# Altium PCB BGA Modules.PcbDoc
Units mil, origin at the board's own origin, x right, y up, seen from the top; angles counter-clockwise.
Board outline 405 x 415 mil, 2 copper layers (Top Layer, Bottom Layer); 9 components, 9 nets, 72 pads, 8 vias.
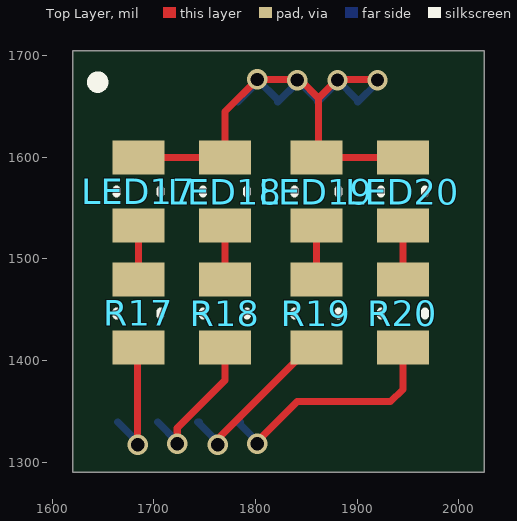
[diagram p0: Top Layer view]
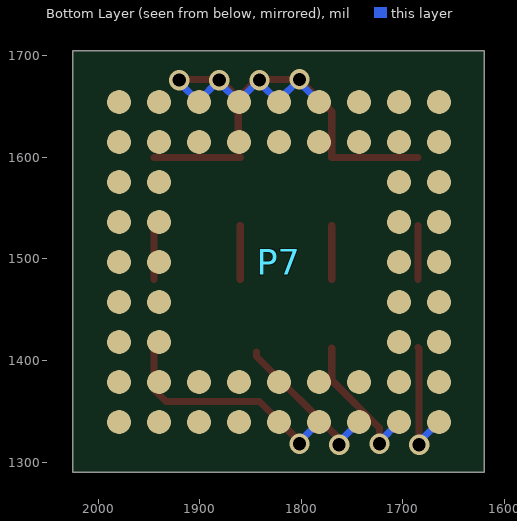
[diagram p1: Bottom Layer view, seen from below]

## Layer stack, top to bottom
Top Layer: signal copper 1.4
Dielectric: dielectric 12.6, FR-4, Dk 4.8
Bottom Layer: signal copper 1.4

## Board outline
1620,1290 2025,1290 2025,1705 1620,1705

## Design rules (kind name [scope] priority, off if disabled: settings)
Clearance [All] p1: gap=7
ComponentClearance [All] p1 off: gap=10 collisioncheckmode=3 verticalgap=10 showdistances=FALSE
PolygonConnect [All] p1: connectstyle=Relief reliefconductorwidth=10 reliefentries=4 polygonreliefangle="90 Angle" airgapwidth=10
RoutingVias [All] p1: holewidth=28 width=50 viastyle="Through Hole" minholewidth=28 minwidth=50 maxholewidth=28 maxwidth=50
SolderMaskExpansion [All] p1: expansion=4
Width [All] p1: maxlimit=10 minlimit=7 preferedwidth=10
27 further rules are at their usual default settings.

## Components (designator, comment, footprint, x,y, rotation, side; value= is the part's Value field where it differs from the comment)
LED17 "LED_1206" RESC0805(2012)70_L 1685,1566.32 r90 top
LED18 "LED_1206" RESC0805(2012)70_L 1770,1566.32 r90 top
LED19 "LED_1206" RESC0805(2012)70_L 1860,1566.32 r90 top
LED20 "LED_1206" RESC0805(2012)70_L 1945,1566.32 r90 top
P7 "MODCMP-P056-M10X10" MODCMP-P056-M10X10 1625,1693.7 r0 top
R17 "0805" RESC0805(2012)70_L 1685,1446.32 r270 top
R18 "0805" RESC0805(2012)70_L 1770,1446.32 r270 top
R19 "0805" RESC0805(2012)70_L 1860,1446.32 r270 top
R20 "0805" RESC0805(2012)70_L 1945,1446.32 r270 top

## Footprints (in the part's own frame and the unit in brackets; to place one, negate y for a bottom-side part, rotate by r counter-clockwise, add the part's x,y. Pads: shape width x height; smd on the part's side, far side on the other; paste and mask are expansions set on the pad)
MODCMP-P056-M10X10 [mm] "Module Component - 1mm Pitch, 56-Pin, 10x10mm"
  round 0.6 smd far side mask+0.05: A1(1,-1) A2(2,-1) A3(3,-1) A4(4,-1) A5(5,-1) A6(6,-1) A7(7,-1) A8(8,-1) A9(9,-1) B1(1,-2) B2(2,-2) B3(3,-2) B4(4,-2) B5(5,-2) B6(6,-2) B7(7,-2) B8(8,-2) B9(9,-2) C1(1,-3) C2(2,-3) C8(8,-3) C9(9,-3) D1(1,-4) D2(2,-4) D8(8,-4) D9(9,-4) E1(1,-5) E2(2,-5) E8(8,-5) E9(9,-5) F1(1,-6) F2(2,-6) F8(8,-6) F9(9,-6) G1(1,-7) G2(2,-7) G8(8,-7) G9(9,-7) H1(1,-8) H2(2,-8) H3(3,-8) H4(4,-8) H5(5,-8) H6(6,-8) H7(7,-8) H8(8,-8) H9(9,-8) J1(1,-9) J2(2,-9) J3(3,-9) J4(4,-9) J5(5,-9) J6(6,-9) J7(7,-9) J8(8,-9) J9(9,-9)
  silkscreen extent 0.38,-0.62 0.62,-0.38
RESC0805(2012)70_L [mm] "Chip Resistor, Body 2.0x1.3mm, IPC High Density"
  rect 0.85x1.3 smd: 1(-0.85,0) 2(0.85,0)
  silkscreen extent -0.05,-0.55 0.05,0.55, body extent -1.1,-0.67 1.1,0.68, height 0.7

## Part data
LED17 LED18 LED19 LED20: library part CMP-0201-0036, "GREEN color, 1206, SMD"
P7: library part MOD-0100-0123, "Module Component - 1mm Pitch, 56-Pin, 10mmX10mm"
R17 R18 R19 R20: library part CMP-0501-0000, "Jumper 0805 (2012 Metric)"

## Via types
v1: diameter 20, hole 13, Top Layer to Bottom Layer, tented both sides, 8 vias

## Nets (pads, with @x,y where several pads share a name; then routed paths per layer and width w, separated by ;. In a path a pad name is that pad's centre, name@x,y a point inside that pad or via, vN(x,y) a via of type N, cw(c..) or ccw(c..) an arc to the next point about the centre after c; other vN are vias at no path point)
GND: LED17.2 LED18.2 LED19.2 LED20.2 P7.A4 P7.A5 P7.A6 P7.A7 | length 662.8
  Top Layer w7: LED17.2 LED18.2 1770,1644.95 v1(1801.75,1676.7) 1840.3,1676.7 v1(1841,1676) 1844.21,1676 1862,1658.21 ; v1@1880.21,1676.42 1862,1658.21 ; v1@1880.49,1676.7 1919.3,1676.7 v1(1920,1676) ; LED20.2 LED19.2 1862,1601.78 1862,1658.21
  Bottom Layer w7: P7.A4 1801.75,1673.6 v1(1801.75,1676.7) 1821.85,1656.6 P7.A5 1841,1673.48 v1(1841,1676) 1861.22,1655.78 P7.A6 1880.63,1673.74 v1(1880.63,1676) 1900.59,1656.04 P7.A7 1920,1673.74 v1(1920,1676)
LED_C1: P7.J1 R17.2 | length 127.1
  Top Layer w7: v1(1684,1317) 1684,1411.85 R17.2
  Bottom Layer w7: P7.J1@1664.73,1339.37 P7.J1 1684,1319.74 v1(1684,1317)
LED_C2: P7.J2 R18.2 | length 143.1
  Top Layer w7: v1(1723,1318) 1723,1333.64 1770,1380.64 R18.2@1770,1412.32
  Bottom Layer w7: P7.J2 1723,1320.11 v1(1723,1318)
LED_C3: P7.J3 R19.2 | length 152.3
  Top Layer w7: v1@1762,1322 1844,1404 R19.2@1844,1408.32
  Bottom Layer w7: P7.J3@1744.63,1339.37 P7.J3 1762.74,1319.74 v1(1762.74,1317)
LED_C4: P7.J4 R20.2 | length 234.7
  Top Layer w7: v1@1801,1322 1803.36,1322 1841,1359.64 1933,1359.64 1945,1371.64 R20.2@1945,1413.32
  Bottom Layer w7: P7.J4@1785.27,1339.37 P7.J4 1799.85,1322 v1@1801,1322
  other v1: 1801.74,1318
NetLED17_1: LED17.1 R17.1 | length 53.1
  Top Layer w7: R17.1 LED17.1
NetLED18_1: LED18.1 R18.1 | length 53.1
  Top Layer w7: R18.1 LED18.1
NetLED19_1: LED19.1 R19.1 | length 53.1
  Top Layer w7: R19.1 LED19.1
NetLED20_1: LED20.1 R20.1 | length 53.1
  Top Layer w7: R20.1 LED20.1
pads on no net: P7.A1 P7.A2 P7.A3 P7.A8 P7.A9 P7.B1 P7.B2 P7.B3 P7.B4 P7.B5 P7.B6 P7.B7 P7.B8 P7.B9 P7.C1 P7.C2 P7.C8 P7.C9 P7.D1 P7.D2 P7.D8 P7.D9 P7.E1 P7.E2 P7.E8 P7.E9 P7.F1 P7.F2 P7.F8 P7.F9 P7.G1 P7.G2 P7.G8 P7.G9 P7.H1 P7.H2 P7.H3 P7.H4 P7.H5 P7.H6 P7.H7 P7.H8 P7.H9 P7.J5 P7.J6 P7.J7 P7.J8 P7.J9

## Silkscreen, mask and mechanical layers (free items; w line width, h text height)
Mechanical 2:
  the board outline again, w10